# Altium PCB PCB.PcbDoc
Units mil, origin at the board's own origin, x right, y up, seen from the top; angles counter-clockwise.
Board outline 6000 x 4000 mil, 2 copper layers (Top Layer, Bottom Layer); 9 components, 6 nets, 26 pads, 0 vias.
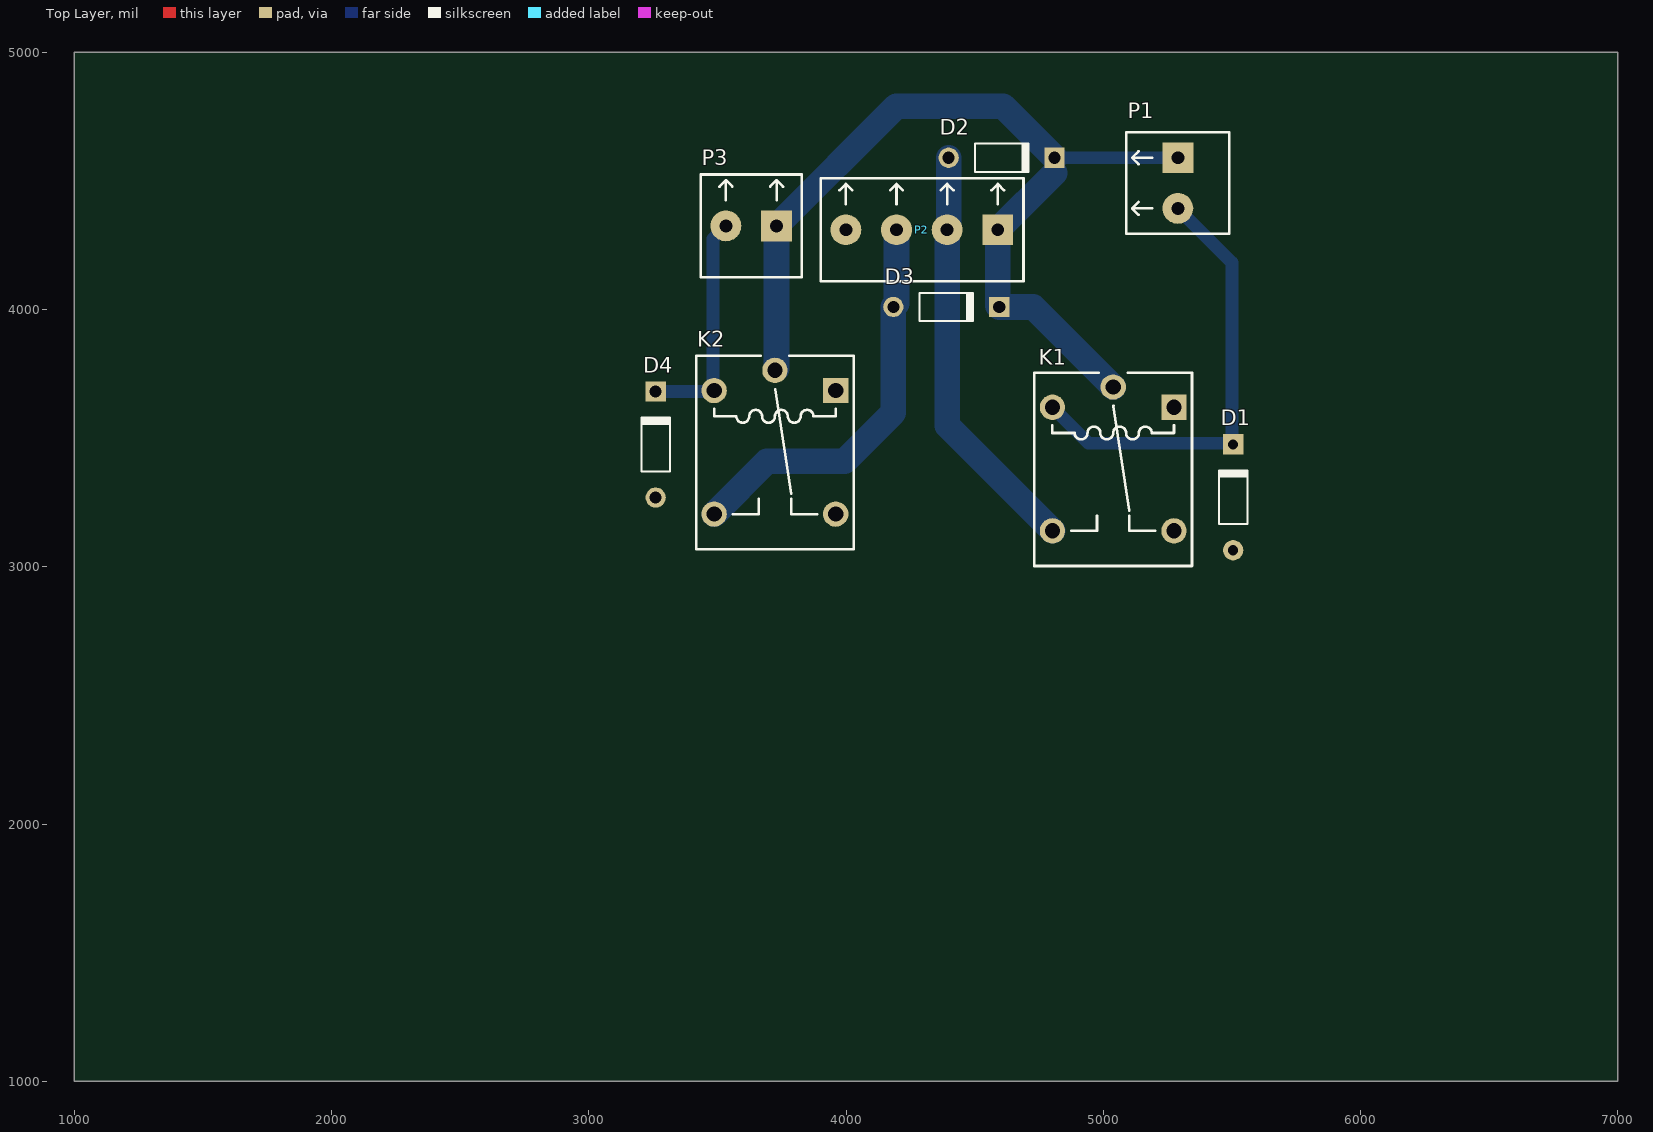
[diagram p0: Top Layer view]
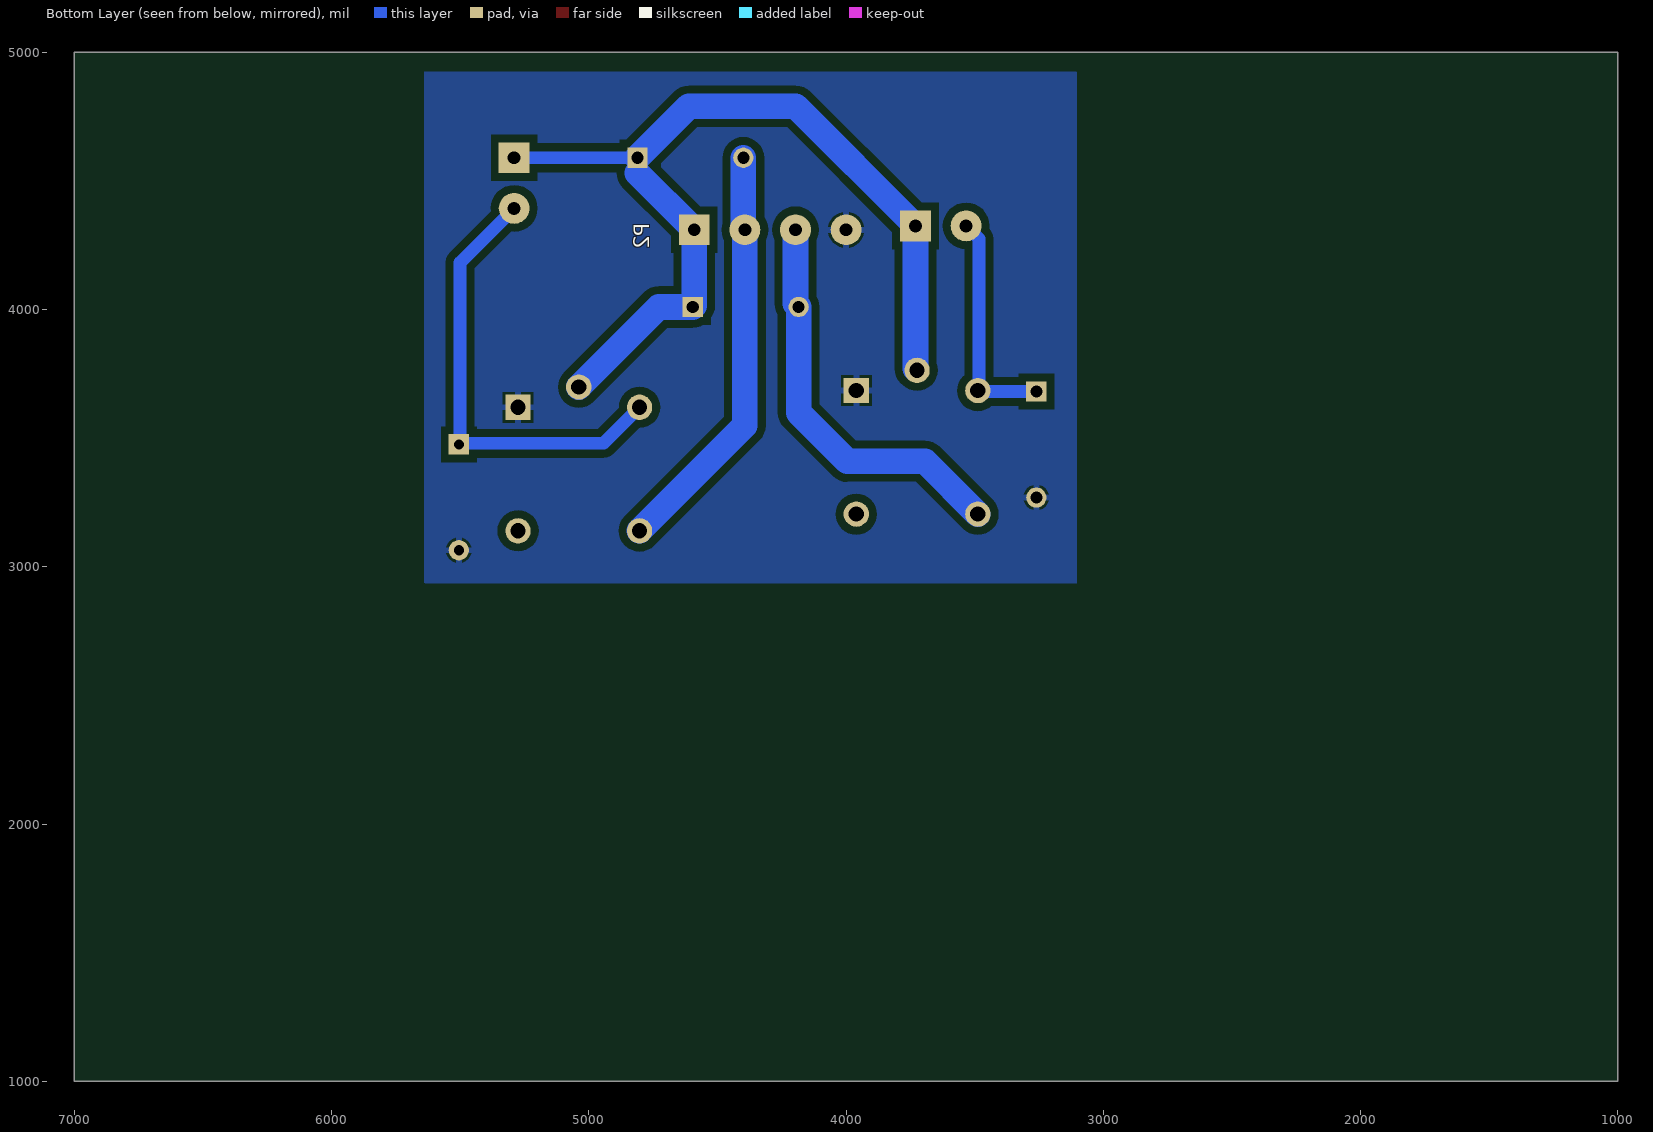
[diagram p1: Bottom Layer view, seen from below]
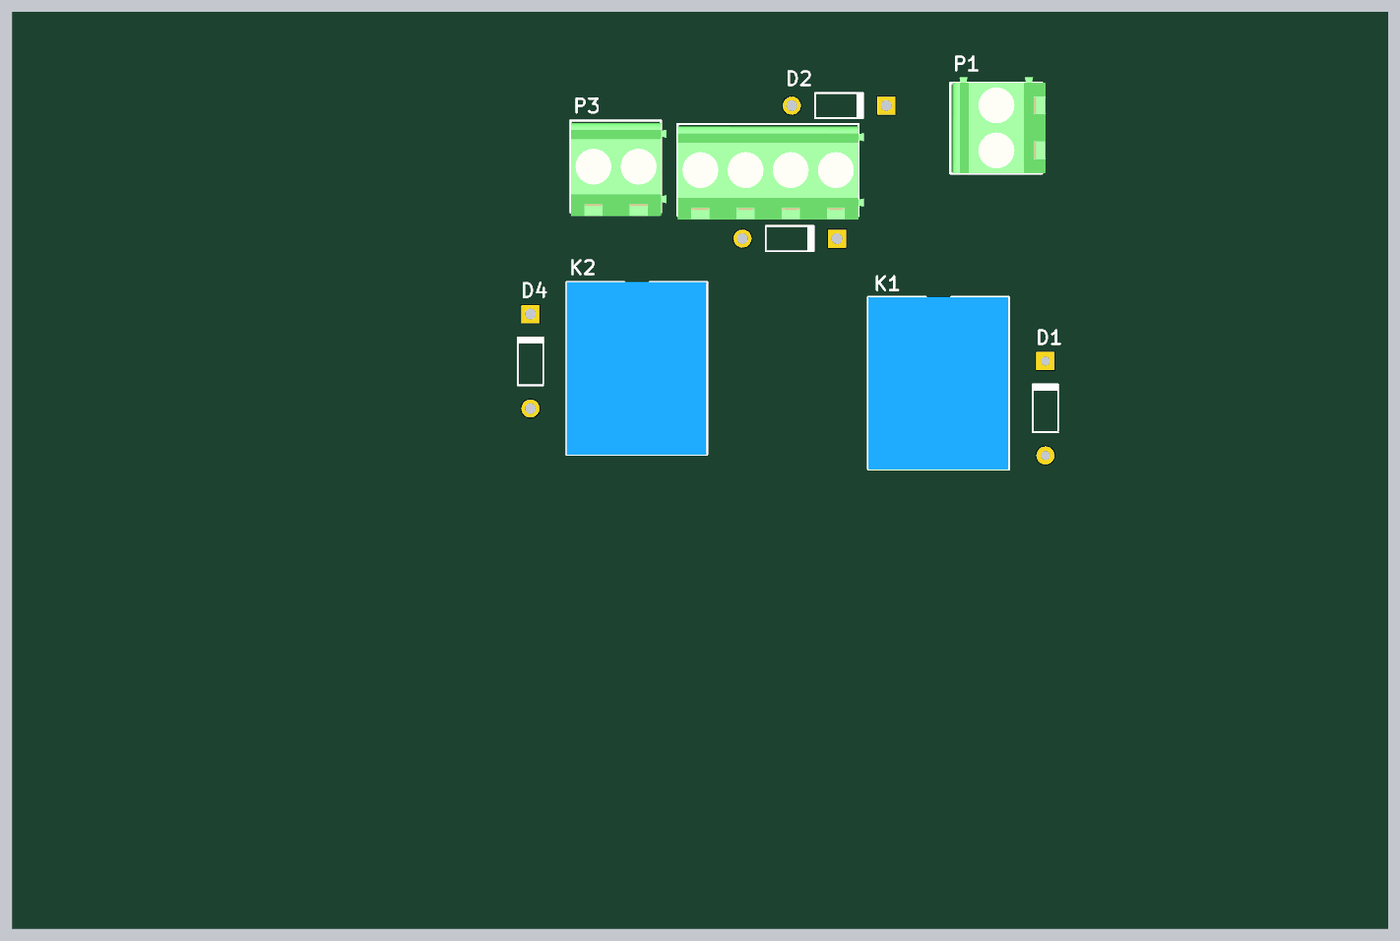
[diagram p2: 3D render of the assembled board from above, using the file's embedded part models]

## Layer stack, top to bottom
Top Layer: signal copper 1.4
Dielectric: dielectric 12.6, FR-4, Dk 4.8
Bottom Layer: signal copper 1.4

## Board outline
1000,1000 7000,1000 7000,5000 1000,5000

## Design rules (kind name [scope] priority, off if disabled: settings)
Clearance [All] p1: gap=30
HoleSize [All] p1: absolutevalues=TRUE maxlimit=100 minlimit=27.56 maxpercent=80.000 minpercent=20.000
HoleToHoleClearance [All] p1: gap=15 allowstackedmicrovias=TRUE
MinimumSolderMaskSliver [All] p1: minsoldermaskwidth=15
PasteMaskExpansion [All] p1: expansion=5
PlaneConnect [All] p1: planeconnectstyle=Relief reliefexpansion=20 reliefentries=4 reliefconductorwidth=25 reliefairgap=25
PolygonConnect [All] p1: connectstyle=Relief reliefconductorwidth=25 reliefentries=4 polygonreliefangle="90 Angle" airgapwidth=10
RoomDefinition Sheet [InComponentClass('Sheet')] p1: confinementstyle=ConfineIn formatcopy=TRUE lockcomponents=FALSE outline 7045,1065 10990,1065 10990,2585 7045,2585
RoutingVias [All] p1: holewidth=28 width=50 viastyle="Through Hole" minholewidth=28 minwidth=50 maxholewidth=28 maxwidth=50
SilkToSilkClearance [All] p1: silktosilkclearance=30
SolderMaskExpansion [All] p1: expansion=5
Width [All] p1: maxlimit=200 minlimit=10 preferedwidth=25 toplayer_maxwidth=10 toplayer_prefwidth=10 bottomlayer_minwidth=20 minimp=50.000000 maximp=50.000000 favimp=50.000000
22 further rules are at their usual default settings.

## Components (designator, comment, footprint, x,y, rotation, side; value= is the part's Value field where it differs from the comment)
D1 "Diode 1N4007" DO-41#1 5505,3270 r90 top
D2 "Diode 1N4007" DO-41#2 4605,4590 r0 top
D3 "Diode 1N4007" DO-41#2 4390,4010 r0 top
D4 "Diode 1N4007" DO-41#2 3260,3475 r90 top
K1 "AZ1RC-9V" Relay-A 5275,3620 r0 top
K2 "AZ1RC-9V" Relay-A 3960,3685 r0 top
P1 "SW1" KRE_2 5290,4590 r270 top
P2 "Terminal" KRE_4 4590,4310 r180 top
P3 "SW2" KRE_2 3730,4325 r180 top

## Footprints (in the part's own frame and the unit in brackets; to place one, negate y for a bottom-side part, rotate by r counter-clockwise, add the part's x,y. Pads: shape width x height; smd on the part's side, far side on the other; paste and mask are expansions set on the pad)
DO-41#1 [mm] "Diode, Axial; Body 5.2 x 2.7 mm (LxDia. max), Lead Dia. 0.86 mm (max)"
  round 2 hole 1: 1(-5.23,0)
  rect 2x2 hole 1: 2(5.23,0)
  silkscreen extent -2.65,-1.4 2.75,1.4
DO-41#2 [mm] "Diode, Axial; Body 5.2 x 2.7 mm (LxDia. max), Lead Dia. 0.86 mm (max)"
  round 2 hole 1.2: 1(-5.23,0)
  rect 2x2 hole 1.2: 2(5.23,0)
  silkscreen extent -2.65,-1.41 2.75,1.4
KRE_2 [mil] "Terminal Block 2 pins"
  rect 120x120 hole 50: 1(0,0)
  round 120 hole 50: 2(196.85,0)
  silkscreen extent -98,-200 295,200, body extent -123,-190 294,216, height 559
KRE_4 [mil] "Terminal Block 4 pins"
  rect 120x120 hole 50: 1(0,0)
  round 120 hole 50: 2(196.85,0) 3(393.7,0) 4(590.55,0)
  silkscreen extent -100,-200 689,200, body extent -123,-190 688,216, height 559
Relay-A [mm] "Metaltex Relay Type A; 3D: Jean-François Garneau"
  rect 2.5x2.5 hole 1.5: 1(0,0)
  round 2.5 hole 1.5: 2(-12,0) 3(-6,2) 4(0,-12.2) 5(-12,-12.2)
  silkscreen extent -13.78,-15.67 1.78,3.43, body extent -13.78,-15.67 1.72,3.43, height 15.3

## Part data
D1 D2 D3 D4: "1 Amp General Purpose Rectifier"
K1 K2: "Miniature Relay, 10 A, 9 Vdc, 250 Vac"
P1 P3: library part KRE_2, "Terminal Block 1x2"
P2: library part KRE_4, "Terminal Block 1x4"

## Nets (pads, with @x,y where several pads share a name; then routed paths per layer and width w, separated by ;. In a path a pad name is that pad's centre, name@x,y a point inside that pad or via, vN(x,y) a via of type N, cw(c..) or ccw(c..) an arc to the next point about the centre after c; other vN are vias at no path point)
+12V: D2.2 D3.2 K1.3 K2.3 P1.1 P2.1 P3.1 | length 3636.2
  Bottom Layer w20: D3.2@4590,4015.91 D3.2 ; 4810.91,4530.91 D2.2
  Bottom Layer w50: D2.2 P1.1
  Bottom Layer w100: K2.3@3730,3769.96 P3.1 4195,4790 4610.91,4790 D2.2 ; D3.2@4590,4015.91 P2.1 4810.91,4530.91 ; D3.2 4727.52,4010 K1.3
GND: D1.1 D4.1 K1.1 K2.1 P2.4
NetD1_2: D1.2 K1.2 P1.2 | length 1755.6
  Bottom Layer w50: K1.2 4942.56,3480 5500,3480 5500,4183.15 P1.2
NetD2_1: D2.1 K1.5 P2.2 | length 1622.4
  Bottom Layer w20: P2.2 P2.2@4399.09,4315.94
  Bottom Layer w100: P2.2 4393.15,3549.1 K1.5 ; P2.2@4399.09,4315.94 D2.1
NetD3_1: D3.1 K2.5 P2.3 | length 1575.9
  Bottom Layer w20: D3.1 D3.1@4196.3,4022.2
  Bottom Layer w100: K2.5 3692.88,3410 3995,3410 4184.09,3599.09 D3.1 ; D3.1@4196.3,4022.2 P2.3
NetD4_2: D4.2 K2.2 P3.2 | length 888.1
  Bottom Layer w50: D4.2 3483.47,3680.91 3483.47,4275.32 P3.2
pads on no net: K1.4 K2.4

## Polygon pours and split planes (outlines as drawn)
GND on Bottom Layer "Bottom Layer-No Net" (solid, pour order 2): 3100,4925 3102.63,4921.8 3102.63,2936.39 5634.74,2936.39 5640,2930 5640,4925